# Altium PCB BMS.PcbDoc (part 1 of 2)
Units mil, origin at the board's own origin, x right, y up, seen from the top; angles counter-clockwise.
Board outline 4985 x 2480 mil, 2 copper layers (Top Layer, Bottom Layer); 157 components, 120 nets, 511 pads, 165 vias.
Unrouted connection lines stored in the file: 1.
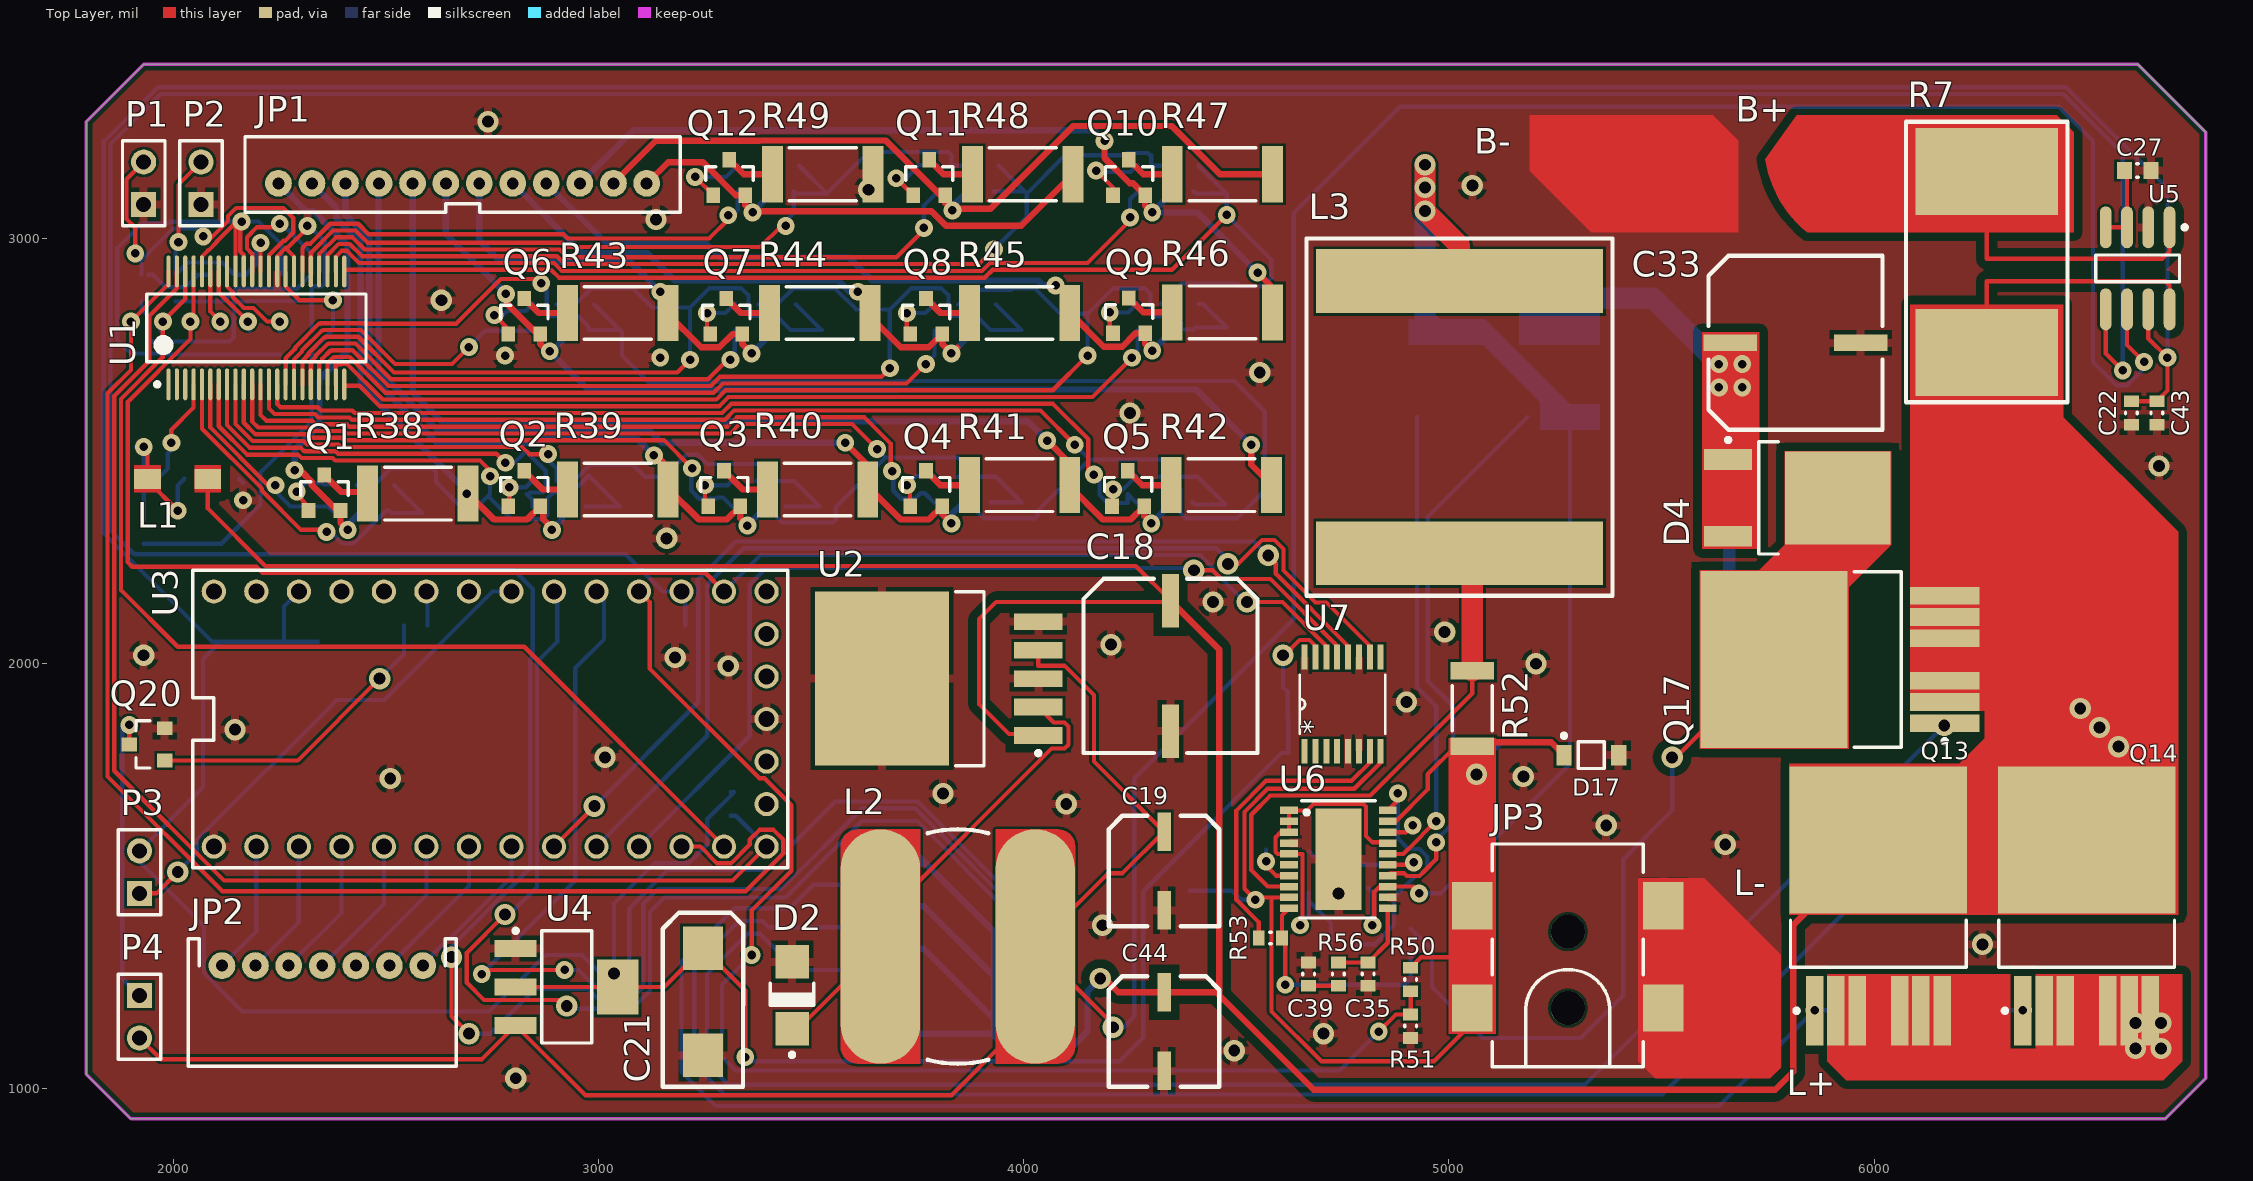
[diagram p0: Top Layer view]
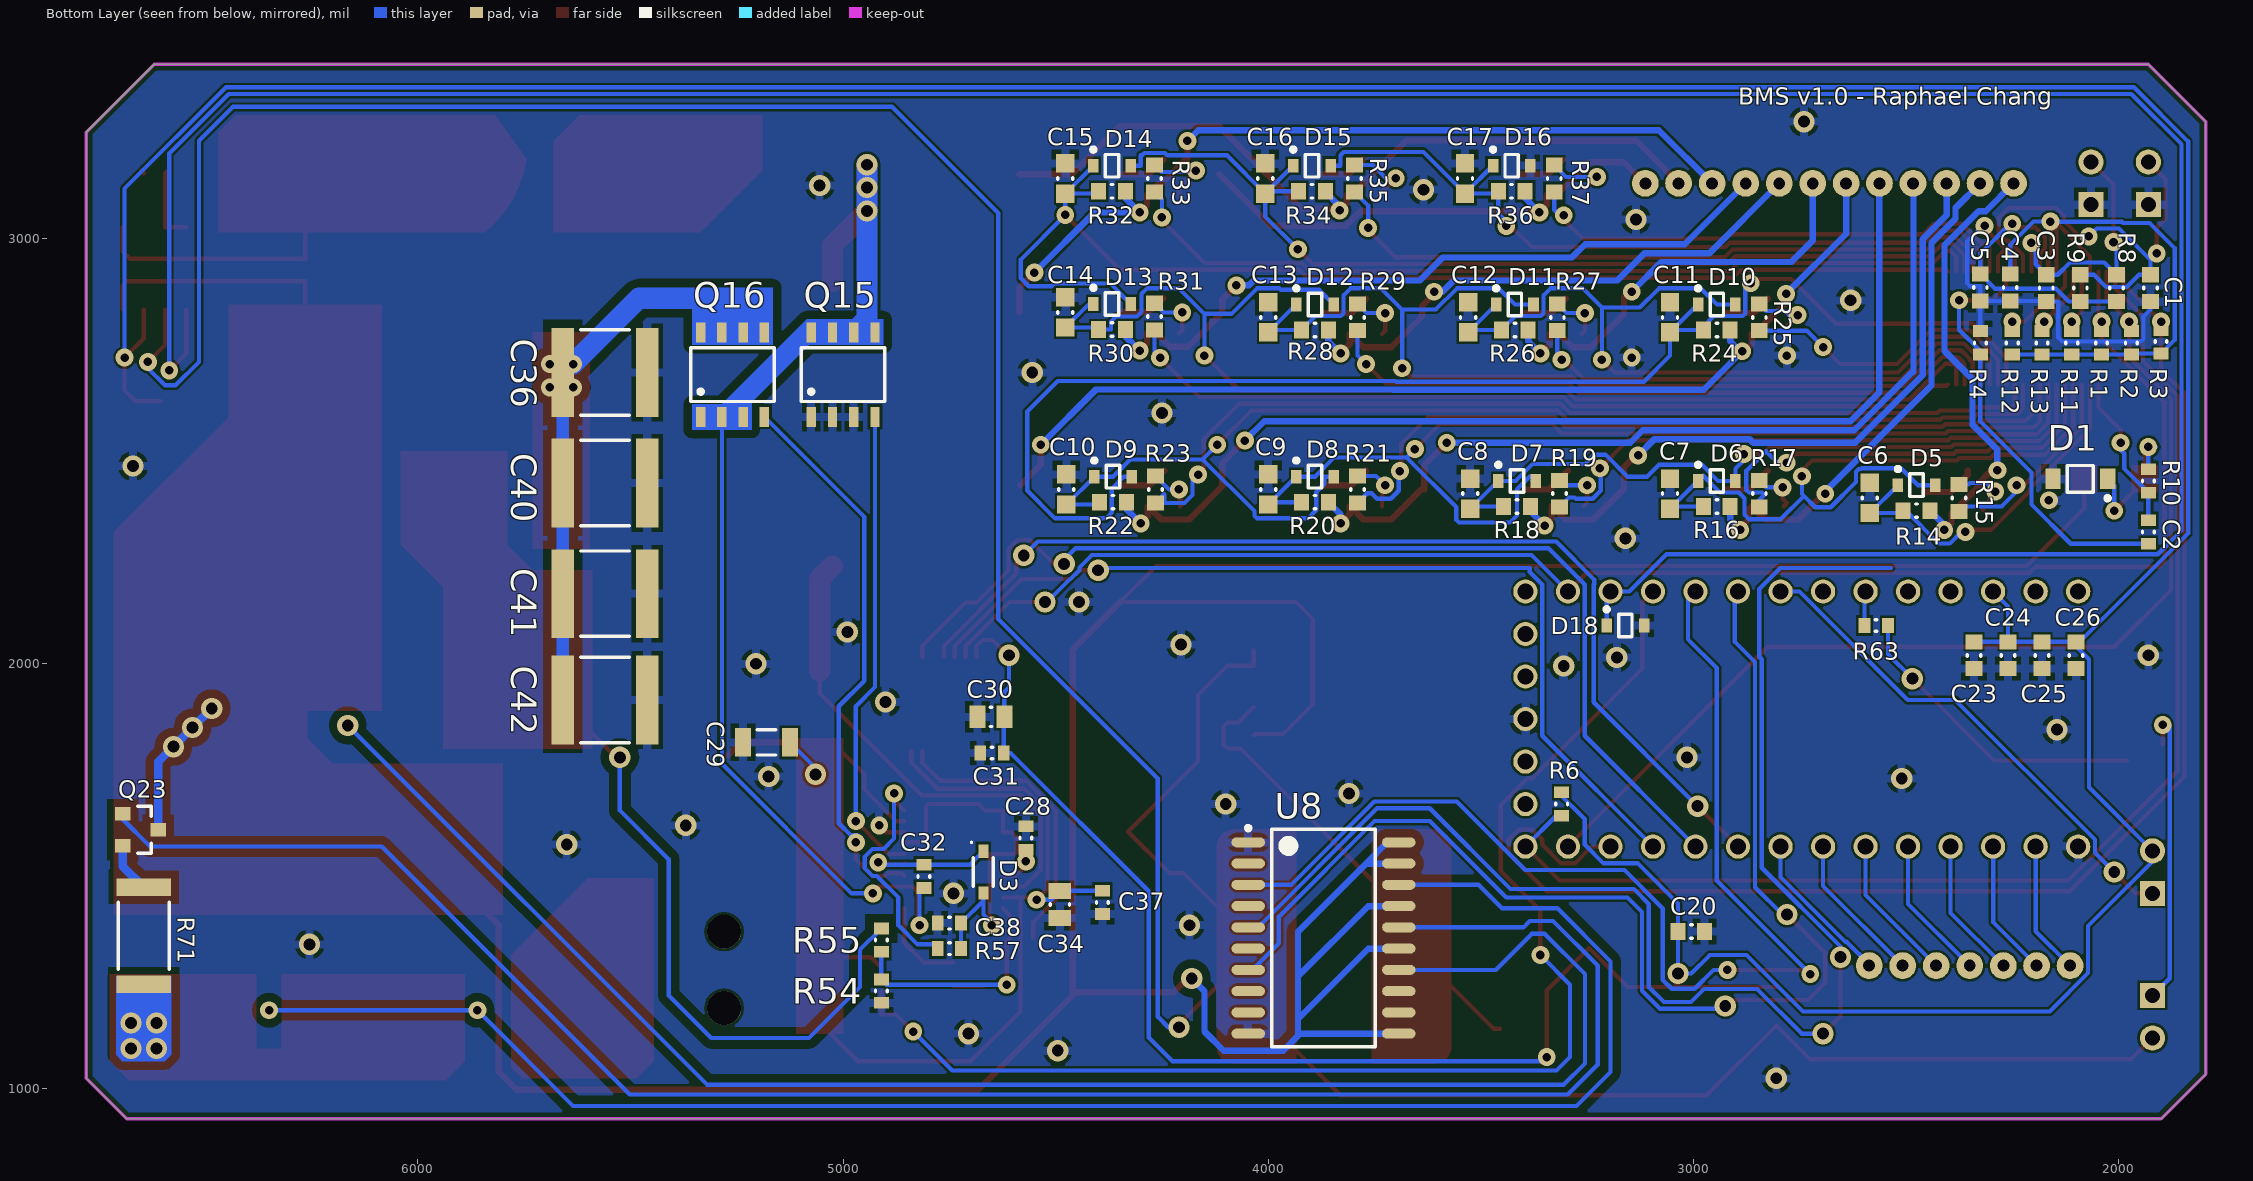
[diagram p1: Bottom Layer view, seen from below]

## Layer stack, top to bottom
Top Solder: solder mask 0.4, Solder Resist, Dk 3.5
Top Layer: signal copper 1.4
Dielectric 1: dielectric 12.6, FR-4, Dk 4.8
Bottom Layer: signal copper 1.4
Bottom Solder: solder mask 0.4, Solder Resist, Dk 3.5

## Board outline
1795,1035 1900,930 6685,930 6780,1025 6780,3250 6620,3410 1930,3410 1795,3275

## Design rules (kind name [scope] priority, off if disabled: settings)
Clearance Clearance_10 [InNet('LOAD_GATE') vs InNet('GND')] p1: gap=19.68
Clearance Clearance_9 [InNet('PRECHARGE') vs InNet('GND')] p2: gap=19.68
Clearance Clearance_8 [InNet('NetQ17_2') vs InNet('GND')] p3: gap=19.68
Clearance Clearance_7 [InNet('NetQ23_3') vs InNet('GND')] p4: gap=19.68
Clearance Clearance_6 [InNet('NetD4_1') vs InNet('GND')] p5: gap=19.68
Clearance Clearance_5 [InNet('NetC33_1') vs InNet('GND')] p6: gap=19.68
Clearance Clearance_4 [(IsRegion AND InNet('NetC32_1')) vs InNet('GND')] p7: gap=19.68
Clearance Clearance_3 [InNet('L+') vs InNet('GND')] p8: gap=19.68
Clearance Clearance_2 [InNet('B+') vs InNet('GND')] p9: gap=19.68
Clearance Clearance_1 [InNet('VDD') vs InNet('GND')] p10: gap=19.68
Clearance [All] p11: gap=5.91
PolygonConnect [All] p1: connectstyle=Relief reliefconductorwidth=20 reliefentries=4 polygonreliefangle="90 Angle" airgapwidth=10
RoutingVias [All] p1: holewidth=28 width=50 viastyle="Through Hole" minholewidth=20 minwidth=40 maxholewidth=28 maxwidth=50
SolderMaskExpansion [All] p1: expansion=4
Width [All] p1: maxlimit=50 minlimit=10 preferedwidth=10
30 further rules are at their usual default settings.

## Classes and differential pairs
component class U_Charging: C28 C29 C30 C31 C32 C33 C34 C35 C36 C37 C38 C39 C40 C41 C42 D3 D4 D17 JP3 L3 Q15 Q16 Q17 R50 R51 R52 R53 R54 R55 R56 R57 U6 U7
component class U_LTC6803: C1 C2 C3 C4 C5 C6 C7 C8 C9 C10 C11 C12 C13 C14 C15 C16 C17 D1 D5 D6 D7 D8 D9 D10 D11 D12 D13 D14 D15 D16 JP1 L1 P1 P2 Q1 Q2 Q3 Q4 Q5 Q6 Q7 Q8 Q9 Q10 Q11 Q12 R1 R2 R3 R4 R8 R9 R10 R11 R12 R13 R14 R15 R16 R17 R18 R19 R20 R21 R22 R23 R24 R25 R26 R27 R28 R29 R30 R31 R32 R33 R34 R35 R36 R37 R38 R39 R40 R41 R42 R43 R44 R45 R46 R47 R48 R49 U1
component class U_MCU: C18 C19 C20 C21 C22 C23 C24 C25 C26 C27 C43 C44 D2 D18 JP2 L2 P3 P4 Q13 Q14 Q20 Q23 R6 R7 R63 R71 U2 U3 U4 U5 U8

## Components (designator, comment, footprint, x,y, rotation, side; value= is the part's Value field where it differs from the comment)
C1 "1uF" CAPC0603(1608)100_N 1925,2883.5 r90 bottom
C2 "100nF" CAPC0603(1608)100_L 1930,2310 r90 bottom
C3 "1uF" CAPC0603(1608)100_N 2170,2883.5 r90 bottom
C4 "1uF" CAPC0603(1608)100_N 2255,2885 r90 bottom
C5 "1uF" CAPC0603(1608)100_N 2325,2885 r90 bottom
C6 "100nF" CAPC0603(1608)100_M 2585,2390 r270 bottom
C7 "100nF" CAPC0603(1608)100_M 3055,2400 r270 bottom
C8 "100nF" CAPC0603(1608)100_M 3525,2400 r270 bottom
C9 "100nF" CAPC0603(1608)100_M 4000,2410 r270 bottom
C10 "100nF" CAPC0603(1608)100_M 4475,2410 r270 bottom
C11 "100nF" CAPC0603(1608)100_M 3055,2815 r270 bottom
C12 "100nF" CAPC0603(1608)100_M 3530,2815 r270 bottom
C13 "100nF" CAPC0603(1608)100_M 4000,2815 r270 bottom
C14 "100nF" CAPC0603(1608)100_M 4477.28,2826.42 r270 bottom
C15 "100nF" CAPC0603(1608)100_M 4477.28,3141.42 r270 bottom
C16 "100nF" CAPC0603(1608)100_M 4007.28,3141.42 r270 bottom
C17 "100nF" CAPC0603(1608)100_M 3537.28,3141.42 r270 bottom
C18 "" "CAP 180UF 50V" 4345,1995 r0 top
C19 "" "CAP 300uF 6.3V" 4330,1512.52 r0 top
C20 "2.2uF" CAPC0603(1608)55_N 3005,1370 r180 bottom
C21 "100uF" AVX-CAPC7343_V 3245,1205 r270 top
C22 "2.2uF" CAPC0603(1608)55_L 6605,2590 r90 top
C23 "2.2uF" CAPC0603(1608)55_N 2340,2020 r90 bottom
C24 "2.2uF" CAPC0603(1608)55_N 2260,2020 r90 bottom
C25 "2.2uF" CAPC0603(1608)55_N 2180,2020 r90 bottom
C26 "2.2uF" CAPC0603(1608)55_N 2100,2020 r90 bottom
C27 "2.2uF" CAPC0603(1608)55_N 6620,3160 r180 top
C28 "0.1uF" CAPC0603(1608)100_L 4570,1590 r90 bottom
C29 "47uF" CAPC1206(3216)190_L 5180,1815 r0 bottom
C30 "10uF" CAPC0805(2012)145_L 4652.2,1875 r180 bottom
C31 "100nF" CAPC0603(1608)100_L 4649.65,1790 r180 bottom
C32 "0.1uF" CAPC0603(1608)100_L 4810,1500 r90 bottom
C33 "" "CAP 180UF 50V" 5815,2755 r90 top
C34 "10uF" CAPC0805(2012)145_L 4490,1433.78 r90 bottom
C35 "180pF" CAPC0603(1608)100_L 4810,1270 r270 top
C36 "22uF" CAPC2220(5750)230_L 5560,2685 r0 bottom
C37 "100nF" CAPC0603(1608)100_L 4390,1438.78 r90 bottom
C38 "4.7uF" CAPC0603(1608)55_L 4750,1390 r180 bottom
C39 "15nF" CAPC0603(1608)100_L 4670,1270 r90 top
C40 "22uF" CAPC2220(5750)230_L 5560,2425 r0 bottom
C41 "22uF" CAPC2220(5750)230_L 5560,2165 r0 bottom
C42 "22uF" CAPC2220(5750)230_L 5560,1915 r0 bottom
C43 "2.2uF" CAPC0603(1608)55_L 6665,2590 r90 top
C44 "" "CAP 300uF 6.3V" 4330,1135 r0 top
D1 "" SOD-123 2090,2435 r0 bottom
D2 "MURA130T3G" ONSC-SMA-2-403D-02_V 3455,1220 r90 top
D3 "BAS170W" INF-SOD323_V 4670,1510 r180 bottom
D4 "V12W60C" DPAK229P1003X238-3N 5820,2390 r0 top
D5 "" ONSC-SOD-323-2-477-02_V 2475,2420 r180 bottom
D6 "" ONSC-SOD-323-2-477-02_V 2945,2430 r180 bottom
D7 "" ONSC-SOD-323-2-477-02_V 3415,2430 r180 bottom
D8 "" ONSC-SOD-323-2-477-02_V 3890,2440 r180 bottom
D9 "" ONSC-SOD-323-2-477-02_V 4365,2440 r180 bottom
D10 "" ONSC-SOD-323-2-477-02_V 2945,2845 r180 bottom
D11 "" ONSC-SOD-323-2-477-02_V 3420,2845 r180 bottom
D12 "" ONSC-SOD-323-2-477-02_V 3890,2845 r180 bottom
D13 "" ONSC-SOD-323-2-477-02_V 4367.28,2846.42 r180 bottom
D14 "" ONSC-SOD-323-2-477-02_V 4367.28,3171.42 r180 bottom
D15 "" ONSC-SOD-323-2-477-02_V 3897.28,3171.42 r180 bottom
D16 "" ONSC-SOD-323-2-477-02_V 3427.28,3171.42 r180 bottom
D17 "" ONSC-SOD-123-2-425-04_V 5335,1785 r0 top
D18 "" ONSC-SOD-323-2-477-02_V 3160,2090 r180 bottom
JP1 "" JST-6-PTH-VERT 2680,3130 r0 top
JP2 "" JST-7-PTH 2350,1290 r180 top
JP3 "" POWER_JACK_SMD_OVERPASTE_REDBOARD_0603 5280,1190 r90 top
L1 "" MURA-BLM31-B60-CHIP-2_V3 2010,2435 r180 top
L2 "" SDR1307 3845,1335 r0 top
L3 "" IHLP-6767GZ 5025,2580 r90 top
P1 "Header 2" HDR1X2 1930,3080 r90 top
P2 "Header 2" HDR1X2 2065,3080 r90 top
P3 "Header 2" HDR1X2 1920,1460 r90 top
P4 "Header 2" HDR1X2 1920,1220 r270 top
Q1 "MOSFET-P" SOT23-3 2355,2400 r0 top
Q2 "MOSFET-P" SOT23-3 2825,2410 r0 top
Q3 "MOSFET-P" SOT23-3 3295,2410 r0 top
Q4 "MOSFET-P" SOT23-3 3770,2410 r0 top
Q5 "MOSFET-P" SOT23-3 4245,2410 r0 top
Q6 "MOSFET-P" SOT23-3 2825,2815 r0 top
Q7 "MOSFET-P" SOT23-3 3300,2815 r0 top
Q8 "MOSFET-P" SOT23-3 3770,2815 r0 top
Q9 "MOSFET-P" SOT23-3 4247.28,2816.42 r0 top
Q10 "MOSFET-P" SOT23-3 4247.28,3141.42 r0 top
Q11 "MOSFET-P" SOT23-3 3777.28,3141.42 r0 top
Q12 "MOSFET-P" SOT23-3 3307.28,3141.42 r0 top
Q13 "IRFS7530" DPAK127P1525X483-7N 6010,1430 r90 top
Q14 "IRFS7530" DPAK127P1525X483-7N 6500,1430 r90 top
Q15 "MOSFET-N" SOIC127P600X175-8N 5000,2680 r90 bottom
Q16 "" SOIC127P600X175-8N 5260,2680 r90 bottom
Q17 "IRFS7530" DPAK127P1525X483-7N 5920,2010 r180 top
Q20 "MOSFET-N" SOT23-3 1940,1810 r90 top
Q23 "MOSFET-N" SOT23-3 6655,1610 r270 bottom
R1 "1M" RESC0603(1608)_L 2040,2755 r90 bottom
R2 "1M" RESC0603(1608)_L 1970,2755 r90 bottom
R3 "1M" RESC0603(1608)_L 1900,2757.44 r90 bottom
R4 "100R" RESC0603(1608)_L 2325,2755 r270 bottom
R6 "1K" RESC0603(1608)_L 3310,1670 r270 bottom
R7 "" WSLP5931 6265,2945 r90 top
R8 "100K" RESC0603(1608)_N 2005,2883.5 r270 bottom
R9 "100K" RESC0603(1608)_N 2090,2883.5 r270 bottom
R10 "100R" RESC0603(1608)_L 1930,2430 r90 bottom
R11 "1M" RESC0603(1608)_L 2110,2755 r90 bottom
R12 "1M" RESC0603(1608)_L 2250,2755 r90 bottom
R13 "1M" RESC0603(1608)_L 2180,2755 r90 bottom
R14 "100R" RESC0603(1608)_N 2475,2360 r180 bottom
R15 "3K3" RESC0603(1608)_N 2375,2390 r90 bottom
R16 "100R" RESC0603(1608)_N 2945,2370 r180 bottom
R17 "3K3" RESC0603(1608)_N 2845,2400 r90 bottom
R18 "100R" RESC0603(1608)_N 3415,2370 r180 bottom
R19 "3K3" RESC0603(1608)_N 3315,2400 r90 bottom
R20 "100R" RESC0603(1608)_N 3890,2380 r180 bottom
R21 "3K3" RESC0603(1608)_N 3790,2410 r90 bottom
R22 "100R" RESC0603(1608)_N 4365,2380 r180 bottom
R23 "3K3" RESC0603(1608)_N 4265,2410 r90 bottom
R24 "100R" RESC0603(1608)_N 2945,2785 r180 bottom
R25 "3K3" RESC0603(1608)_N 2845,2815 r90 bottom
R26 "100R" RESC0603(1608)_N 3420,2785 r180 bottom
R27 "3K3" RESC0603(1608)_N 3320,2815 r90 bottom
R28 "100R" RESC0603(1608)_N 3890,2785 r180 bottom
R29 "3K3" RESC0603(1608)_N 3790,2815 r90 bottom
R30 "100R" RESC0603(1608)_N 4367.28,2786.42 r180 bottom
R31 "3K3" RESC0603(1608)_N 4267.28,2816.42 r90 bottom
R32 "100R" RESC0603(1608)_N 4367.28,3111.42 r180 bottom
R33 "3K3" RESC0603(1608)_N 4267.28,3141.42 r90 bottom
R34 "100R" RESC0603(1608)_N 3897.28,3111.42 r180 bottom
R35 "3K3" RESC0603(1608)_N 3797.28,3141.42 r90 bottom
R36 "100R" RESC0603(1608)_N 3427.28,3111.42 r180 bottom
R37 "3K3" RESC0603(1608)_N 3327.28,3141.42 r90 bottom
R38 "3R3" RESC2512(6432)_N 2575,2400 r180 top
R39 "3R3" RESC2512(6432)_N 3045,2410 r180 top
R40 "3R3" RESC2512(6432)_N 3515,2410 r180 top
R41 "3R3" RESC2512(6432)_N 3990,2420 r180 top
R42 "3R3" RESC2512(6432)_N 4465,2420 r180 top
R43 "3R3" RESC2512(6432)_N 3045,2825 r180 top
R44 "3R3" RESC2512(6432)_N 3520,2825 r180 top
R45 "3R3" RESC2512(6432)_N 3990,2825 r180 top
R46 "3R3" RESC2512(6432)_N 4467.28,2826.42 r180 top
R47 "3R3" RESC2512(6432)_N 4467.28,3151.42 r180 top
R48 "3R3" RESC2512(6432)_N 3997.28,3151.42 r180 top
R49 "3R3" RESC2512(6432)_N 3527.28,3151.42 r180 top
R50 "18K" RESC0603(1608)_L 4910,1257.56 r90 top
R51 "3K6" RESC0603(1608)_L 4910,1147.56 r90 top
R52 "0.008R" RESC2010(5025)_L 5055,1895 r270 top
R53 "232K" RESC0603(1608)_L 4580,1355 r0 top
R54 "12K4" RESC0603(1608)_L 4910,1230 r90 bottom
R55 "464K" RESC0603(1608)_L 4910,1350 r90 bottom
R56 "15K" RESC0603(1608)_L 4740,1270 r270 top
R57 "100K" RESC0603(1608)_L 4750,1330 r0 bottom
R63 "100R" RESC0603(1608)_L 2570,2090 r180 bottom
R71 "750R" RESC2512(6432)_L 6645,1360 r90 bottom
U1 "LTC6803HG-3#PBF" LT-G-44_L 2195,2790 r90 top
U2 "LM2575HV" TS5B_L 3800,1965 r180 top
U3 "" TEENSY_3.0_BASIC 2745,1870 r90 top
U4 "TC2117" SOT-223-DB3_M 2925,1240 r0 top
U5 "LMP8602" M08A_M 6620,2930 r270 top
U6 "LTC3769" TSOP65P640X120_HS-21N 4740,1540 r0 top
U7 "AD5761R" RU_16 4750,1905 r90 top
U8 "LT1161" LT-SW-20_L 3870,1355 r180 bottom

## Footprints (in the part's own frame and the unit in brackets; to place one, negate y for a bottom-side part, rotate by r counter-clockwise, add the part's x,y. Pads: shape width x height; smd on the part's side, far side on the other; paste and mask are expansions set on the pad)
AVX-CAPC7343_V [mm] "SMT Capacitor, 2 Leads, Body 7.3x4.3mm"
  rect 2.6x2.4 smd: 1(-3.202,0.007) 2(3.198,0.007)
  silkscreen extent -5.33,-2.39 5.08,2.41, body extent -3.49,-2.03 3.51,2.04, height 4.05
"CAP 180UF 50V" [mm]
  rect 1x3.2 smd: 1(0,3.9) 2(0,-3.9)
  silkscreen extent -5.2,-5.2 5.2,5.2
"CAP 300uF 6.3V" [mm]
  rect 0.8x2.3 smd: 1(0,2.35) 2(0,-2.35)
  silkscreen extent -3.3,-3.3 3.3,3.3
CAPC0603(1608)55_L [mm] "Chip Capacitor, Body 1.6x0.8mm, Height 0.55mm, IPC High Density"
  rect 0.7x0.9 smd: 1(-0.7,0) 2(0.7,0)
  silkscreen extent -0.05,-0.35 0.05,0.35, body extent -0.87,-0.47 0.88,0.48, height 0.55
CAPC0603(1608)55_N [mm] "Chip Capacitor, Body 1.6x0.8mm, Height 0.55mm, IPC Medium Density"
  rect 0.9x1 smd: 1(-0.8,0) 2(0.8,0)
  silkscreen extent -0.05,-0.4 0.05,0.4, body extent -0.87,-0.48 0.88,0.47, height 0.55
CAPC0603(1608)100_L [mm] "Chip Capacitor, Body 1.6x0.8mm, Height 1.0mm, IPC High Density"
  rect 0.7x0.9 smd: 1(-0.7,0) 2(0.7,0)
  silkscreen extent -0.05,-0.35 0.05,0.35, body extent -0.87,-0.47 0.88,0.48, height 1
CAPC0603(1608)100_M [mm] "Chip Capacitor, Body 1.6x0.8mm, Height 1.0mm, IPC Low Density"
  rect 1.1x1.1 smd: 1(-0.9,0) 2(0.9,0)
  silkscreen extent -0.05,-0.45 0.05,0.45, body extent -0.87,-0.47 0.88,0.48, height 1
CAPC0603(1608)100_N [mm] "Chip Capacitor, Body 1.6x0.8mm, Height 1.0mm, IPC Medium Density"
  rect 0.9x1 smd: 1(-0.8,0) 2(0.8,0)
  silkscreen extent -0.05,-0.4 0.05,0.4, body extent -0.87,-0.48 0.88,0.47, height 1
CAPC0805(2012)145_L [mm] "Chip Capacitor, Body 2.0x1.2mm, Height 1.45mm, IPC High Density"
  rect 0.95x1.35 smd: 1(-0.8,0) 2(0.8,0)
  silkscreen extent -0.05,-0.58 0.05,0.58, body extent -1.1,-0.72 1.1,0.72, height 1.45
CAPC1206(3216)190_L [mm] "Chip Capacitor, Body 3.2x1.6mm, Height 1.9mm, IPC High Density"
  rect 0.95x1.7 smd: 1(-1.4,0) 2(1.4,0)
  silkscreen extent -0.55,-0.75 0.55,0.75, body extent -1.7,-0.9 1.7,0.9, height 1.9
CAPC2220(5750)230_L [mm] "Chip Capacitor, Body 5.7x5.0mm, Height 2.3mm, IPC High Density"
  rect 1.35x5.3 smd: 1(-2.525,0) 2(2.525,0)
  silkscreen extent -1.45,-2.55 1.45,2.55, body extent -3.05,-2.7 3.05,2.7, height 2.3
DPAK127P1525X483-7N [mm] "D2-PAK, 7-Pads, Body 7.93x8.63mm (max), IPC Medium Density"
  rect 4.15x1.05 smd mask+0.051: 1(-6.25,3.81) 2(-6.25,-3.81) 2(-6.25,-2.54) 2(-6.25,-1.27) 2(-6.25,1.27) 2(-6.25,2.54)
  rect 8.8x10.6 smd: 8(3.95,0)
  silkscreen extent -6.37,-5.25 -0.85,5.25, body extent -3.65,-5.28 6,5.28, height 4.83
DPAK229P1003X238-3N [mm] "D-PAK, 3-Pads, Body 6.21x6.73mm (max), IPC Medium Density"
  rect 2.85x1.25 smd: 1(-4.15,-2.29) 1(-4.15,2.29)
  rect 6.3x5.55 smd: 2(2.4,0)
  silkscreen extent -4.27,-3.35 -1.15,3.59, body extent -2.5,-3.37 3.72,3.37, height 2.38
HDR1X2 [mm] "Connector; Header; 2 Position"
  rect 1.5x1.5 hole 0.9: 1(0,0)
  round 1.5 hole 0.9: 2(2.54,0)
  silkscreen extent -1.27,-1.27 3.81,1.27
IHLP-6767GZ [mil]
  rect 150x675 smd: 1(-320,0) 2(320,0)
  silkscreen extent -420,-360 420,360
INF-SOD323_V [mm] "SOD, 2-Leads, Body 1.7x1.25 mm"
  rect 0.6x0.8 smd: 1(0,1.25) 2(0,-1.25)
  silkscreen extent -0.76,-0.85 0.6,1.83, body extent -0.63,-0.85 0.63,0.85, height 1.1
JST-6-PTH-VERT [mil]
  round 63 hole 28: 1(-433.07,0) 2(-354.33,0) 3(-275.59,0) 4(-196.59,0) 5(-117.59,0) 6(-39.37,0) 7(39.37,0) 8(118.11,0) 9(196.85,0) 10(275.85,0) 11(354.85,0) 12(433.07,0)
  silkscreen extent -512,-68 512,110
JST-7-PTH [mil]
  round 63 hole 28: 1(-236.48,0) 2(-157.74,0) 3(-79,0) 4(0,0) 5(79,0) 6(157.22,0) 7(235.96,0)
  silkscreen extent -315,-63 315,237
LT-G-44_L [mm] "SOP, 44-Leads, Body 13.1x5.6mm, Pitch 0.5mm, IPC High Density"
  oval 1.9x0.25 smd: 1(-3.375,5.25) 2(-3.375,4.75) 3(-3.375,4.25) 4(-3.375,3.75) 5(-3.375,3.25) 6(-3.375,2.75) 7(-3.375,2.25) 8(-3.375,1.75) 9(-3.375,1.25) 10(-3.375,0.75) 11(-3.375,0.25) 12(-3.375,-0.25) 13(-3.375,-0.75) 14(-3.375,-1.25) 15(-3.375,-1.75) 16(-3.375,-2.25) 17(-3.375,-2.75) 18(-3.375,-3.25) 19(-3.375,-3.75) 20(-3.375,-4.25) 21(-3.375,-4.75) 22(-3.375,-5.25) 23(3.375,-5.25) 24(3.375,-4.75) 25(3.375,-4.25) 26(3.375,-3.75) 27(3.375,-3.25) 28(3.375,-2.75) 29(3.375,-2.25) 30(3.375,-1.75) 31(3.375,-1.25) 32(3.375,-0.75) 33(3.375,-0.25) 34(3.375,0.25) 35(3.375,0.75) 36(3.375,1.25) 37(3.375,1.75) 38(3.375,2.25) 39(3.375,2.75) 40(3.375,3.25) 41(3.375,3.75) 42(3.375,4.25) 43(3.375,4.75) 44(3.375,5.25)
  silkscreen extent -3.5,-6.55 2.02,6.55, body extent -2.8,-6.55 2.8,6.55, height 2
LT-SW-20_L [mm] "SOIC, 20-Leads, Body 12.8x7.49mm, Pitch 1.27mm, IPC High Density"
  oval 2x0.6 smd: 1(-4.5,5.715) 2(-4.5,4.445) 3(-4.5,3.175) 4(-4.5,1.905) 5(-4.5,0.635) 6(-4.5,-0.635) 7(-4.5,-1.905) 8(-4.5,-3.175) 9(-4.5,-4.445) 10(-4.5,-5.715) 11(4.5,-5.715) 12(4.5,-4.445) 13(4.5,-3.175) 14(4.5,-1.905) 15(4.5,-0.635) 16(4.5,0.635) 17(4.5,1.905) 18(4.5,3.175) 19(4.5,4.445) 20(4.5,5.715)
  silkscreen extent -4.63,-6.5 3.1,6.69, body extent -3.8,-6.5 3.8,6.5, height 2.65
M08A_M [mm] "SOIC, 8-Leads, Body 4.9x3.9mm, Pitch 1.27mm, IPC Low Density"
  oval 2.5x0.7 smd: 1(-2.45,1.905) 2(-2.45,0.635) 3(-2.45,-0.635) 4(-2.45,-1.905) 5(2.45,-1.905) 6(2.45,-0.635) 7(2.45,0.635) 8(2.45,1.905)
  silkscreen extent -2.57,-2.5 0.8,2.93, body extent -2,-2.5 2,2.5, height 1.75
MURA-BLM31-B60-CHIP-2_V3 [mm] "Chip Ferrite Bead, 2-Leads, Body 3.2x1.6mm, Height 1.3mm, 70um Land Pad Thickness, 6A Rated Current"
  rect 1.6x1.2 smd: 1(-1.8,0) 2(1.8,0)
  Top Layer region: -2.6,-0.825 -1,-0.825 -1,0.825 -2.6,0.825
  Top Layer region: 2.6,0.825 1,0.825 1,-0.825 2.6,-0.825
  body extent -1.6,-0.8 1.6,0.8, height 1.3
ONSC-SMA-2-403D-02_V [mm] "Molded, 2-Leads, Body 4.57x2.92mm"
  rect 2x2 smd: 1(-2,0) 2(2,0)
  silkscreen extent -3.67,-1.3 0.74,1.3, body extent -2.16,-1.3 2.16,1.3, height 2.2
ONSC-SOD-123-2-425-04_V [mm] "SOD, 2-Leads, Body 2.69x1.6mm"
  rect 0.91x1.22 smd: 1(-1.635,0) 2(1.635,0)
  silkscreen extent -1.76,-0.8 0.78,1.28, body extent -1.35,-0.8 1.35,0.8, height 1.35
ONSC-SOD-323-2-477-02_V [mm] "SOD, 2-Leads, Body 1.7x1.25mm"
  rect 0.63x0.83 smd: 1(-1.115,0) 2(1.115,0)
  silkscreen extent -1.24,-0.67 0.4,1.09, body extent -0.85,-0.63 0.85,0.63, height 1.06
POWER_JACK_SMD_OVERPASTE_REDBOARD_0603 [mil]
  round 80 hole 80: 1(0,0) 1(180,0)
  rect 111x95 smd: GND(0,-224.41) P$4(241,-224.41) VIN0(0,225) VIN1(241,225)
  silkscreen extent -138,-177 386,178
RESC0603(1608)_L [mm] "Chip Resistor, Body 1.6x0.8mm, IPC High Density"
  rect 0.7x0.9 smd: 1(-0.7,0) 2(0.7,0)
  silkscreen extent -0.05,-0.35 0.05,0.35, body extent -0.85,-0.47 0.85,0.47, height 0.6
RESC0603(1608)_N [mm] "Chip Resistor, Body 1.6x0.8mm, IPC Medium Density"
  rect 0.9x1 smd: 1(-0.8,0) 2(0.8,0)
  silkscreen extent -0.05,-0.4 0.05,0.4, body extent -0.85,-0.47 0.85,0.47, height 0.6
RESC2010(5025)_L [mm] "Chip Resistor, Body 5.0x2.5mm, IPC High Density"
  rect 1.05x2.6 smd: 1(-2.25,0) 2(2.25,0)
  silkscreen extent -1.35,-1.2 1.35,1.2, body extent -2.6,-1.35 2.6,1.35, height 0.71
RESC2512(6432)_L [mm] "Chip Resistor, Body 6.4x3.2mm, IPC High Density"
  rect 1.05x3.25 smd: 1(-2.9,0) 2(2.9,0)
  silkscreen extent -2,-1.52 2,1.53, body extent -3.25,-1.7 3.25,1.7, height 0.75
RESC2512(6432)_N [mm] "Chip Resistor, Body 6.4x3.2mm, IPC Medium Density"
  rect 1.25x3.35 smd: 1(-3,0) 2(3,0)
  silkscreen extent -2,-1.57 2,1.58, body extent -3.25,-1.7 3.25,1.7, height 0.75
RU_16 [mil]
  rect 58x14 smd: 1(-111,89.57) 2(-111,63.98) 3(-111,38.39) 4(-111,12.8) 5(-111,-12.8) 6(-111,-38.39) 7(-111,-63.98) 8(-111,-89.57) 9(111,-89.57) 10(111,-63.98) 11(111,-38.39) 12(111,-12.8) 13(111,12.8) 14(111,38.39) 15(111,63.98) 16(111,89.57)
  silkscreen extent -70,-100 70,100
SDR1307 [mm]
  rrect100% 4.75x14 smd: 1(-4.625,0) 2(4.625,0)
  Top Layer region: -6,7 -2.25,7 -2.25,-7 -6,-7 -6.383,-6.924 -6.707,-6.707 -6.924,-6.383 -7,-6 -7,-6 -7,6 -6.924,6.383 -6.707,6.707 -6.383,6.924 -6,7
  Top Layer region: 6,7 2.25,7 2.25,-7 6,-7 6.383,-6.924 6.707,-6.707 6.924,-6.383 7,-6 7,-6 7,6 6.924,6.383 6.707,6.707 6.383,6.924 6,7
  silkscreen extent -1.81,-7 1.81,7
SOD-123 [mm] "SOD, 2-Leads, Body 2.69x1.6mm"
  rect 0.91x1.22 smd: 1(-1.635,0) 2(1.635,0)
  silkscreen extent -1.76,-0.8 0.78,1.28, body extent -1.35,-0.8 1.35,0.8, height 1.35
SOIC127P600X175-8N [mm] "SOIC, 8-Leads, Body 4.90x3.90mm, Pitch 1.27mm, IPC Medium Density"
  rect 1.194x0.56 smd: 1(-2.528,-0.635) 1(-2.528,0.635) 1(-2.528,1.905) 2(-2.528,-1.905) 3(2.527,-1.905) 3(2.527,-0.635) 3(2.527,0.635) 3(2.527,1.905)
  silkscreen extent -1.6,-2.5 1.6,2.5
SOT23-3 [mil]
  rect 32x36 smd: 1(-37.4,-39.37) 2(0,44) 3(38,-39.37)
  silkscreen extent -55,-4 56,28
SOT-223-DB3_M [mm] "SOT223, 4-Leads, Body 6.5x3.5mm, Pitch 2.3mm, Lead Span 7mm, IPC Low Density"
  rect 2.5x1 smd: 1(-3.05,2.3) 2(-3.05,0) 3(-3.05,-2.3)
  rect 2.5x3.3 smd: 2(3.05,0)
  silkscreen extent -3.17,-3.35 1.5,3.47, body extent -1.85,-3.35 1.85,3.35, height 1.8
TEENSY_3.0_BASIC [mil]
  round 57 hole 38: 0(-300,550) 1(-300,450) 2(-300,350) 3(-300,250) 3.3V(300,450) 3.3V1(-100,-650) 4(-300,150) 5(-300,50) 6(-300,-50) 7(-300,-150) 8(-300,-250) 9(-300,-350) 10(-300,-450) 11(-300,-550) 12(-300,-650) 13(300,-650) 14/A0(300,-550) 15/A1(300,-450) 16/A2(300,-350) 17/A3(300,-250) 18/A4(300,-150) 19/A5(300,-50) 20/A6(300,50) 21/A7(300,150) 22/A8(300,250) 23/A9(300,350) AGND(300,550) GND(-300,650) GND1(0,-650) PGM(100,-650) RESET(200,-650) VBAT(-200,-650) VIN(300,650)
  silkscreen extent -350,-700 350,700
TS5B_L [mm] "D2-PAK, 6-Leads, Body 8.6x10.2mm, Pitch 1.7mm, Lead Span 14.1mm, IPC High Density"
  rect 2.9x1 smd: 1(-5.95,3.4) 2(-5.95,1.7) 3(-5.95,0) 4(-5.95,-1.7) 5(-5.95,-3.4)
  rect 8x10.4 smd: 6(3.4,0)
  silkscreen extent -6.08,-5.2 -1,5.2, body extent -2.7,-5.2 6.19,5.2, height 4.65
TSOP65P640X120_HS-21N [mm] "TSOP, 20-Leads, Body 6.50x4.40mm, Pitch 0.65mm, Thermal Pad 6.07x2.74mm, IPC Medium Density"
  rect 1.05x0.45 smd: 1(-2.95,2.925) 2(-2.95,2.275) 3(-2.95,1.625) 4(-2.95,0.975) 5(-2.95,0.325) 6(-2.95,-0.325) 7(-2.95,-0.975) 8(-2.95,-1.625) 9(-2.95,-2.275) 10(-2.95,-2.925) 11(2.95,-2.925) 12(2.95,-2.275) 13(2.95,-1.625) 14(2.95,-0.975) 15(2.95,-0.325) 16(2.95,0.325) 17(2.95,0.975) 18(2.95,1.625) 19(2.95,2.275) 20(2.95,2.925)
  rect 2.74x6.07 smd: 21(0,0)
  silkscreen extent -2.3,-3.5 2.2,3.5
WSLP5931 [mil]
  rect 205x334 smd: 1(-212.5,0) 2(212.5,0)
  silkscreen extent -330,-190 330,190

## Part data
C1 C3 C4 C5: library part CMP-1035-02730-1, "CAP 1uF 6.3V ±10% 0603 (1608 Metric) Thickness 1mm SMD"
C2: library part CMP-1035-02595-1, "CAP 100nF 100V ±10% 0603 (1608 Metric) Thickness 1mm SMD"
C6 C7 C8 C9 C10 C11 C12 C13 C14 C15 C16 C17 C28 C32: library part CMP-1035-02575-1, "CAP 100nF 6.3V ±5% 0603 (1608 Metric) Thickness 1mm SMD"
C18: library part "CAP 100uF 63V", "Polarized Capacitor (Axial)"
C19: library part "CAP 330uF 6.3V", "Polarized Capacitor (Axial)"
C20 C23 C24 C25 C26 C27: library part CMP-1035-02762-1, "CAP 2.2uF 16V ±10% 0603 (1608 Metric) Thickness 0.55mm SMD"
C21: library part CMP-0279-00002-1, "Capacitor, Tantalum, 220uF 10% 10V MCCT-D (7343-31)"
C22 C43: library part CMP-1035-02751-1, "CAP 2.2uF 4V ±10% 0603 (1608 Metric) Thickness 0.55mm SMD"
C29: library part CMP-1037-04995-1, "CAP 22uF 25V ±20% 1206 (3216 Metric) Thickness 1.9mm SMD"
C30 C34: library part CMP-1036-04932-1, "CAP 10uF 25V ±10% 0805 (2012 Metric) Thickness 1.45mm SMD"
C31 C37: library part CMP-1035-02587-1, "CAP 100nF 25V ±5% 0603 (1608 Metric) Thickness 1mm SMD"
C33: library part "CAP 180uF 50V", "Polarized Capacitor (Axial)"
C35: library part CMP-1035-01398-1, "CAP 180pF 6.3V ±5% 0603 (1608 Metric) Thickness 1mm SMD"
C36 C40 C41 C42: library part CMP-1042-00782-1, "CAP 22uF 50V -20% to +80% 2220 (5750 Metric) Thickness 2.2mm SMD"
C38: library part CMP-1035-02779-1, "CAP 4.7uF 6.3V ±10% 0603 (1608 Metric) Thickness 0.55mm SMD"
C39: library part CMP-1035-02358-1, "CAP 15nF 6.3V ±5% 0603 (1608 Metric) Thickness 1mm SMD"
C44: library part "CAP 47uF 50V", "Polarized Capacitor (Axial)"
D1: library part CMHZ5265B
D2: library part CMP-0902-00297-1, "Surface Mount Ultrafast Power Rectifier, 2-Pin SMA, Pb-Free, Tape and Reel"
D3: library part CMP-1182-00005-1, "Silicon Schottky Diode, -55 to 125 degC, SOD323, Reel, Green"
D5 D6 D7 D8 D9 D10 D11 D12 D13 D14 D15 D16: library part CMP-1060-00726-1, "Zener Voltage Regulator, 300 mW, 2-Pin SOD-323, Tape and Reel"
D17: library part CMP-1060-00237-1, "Zener Voltage Regulator, 500 mW, 2-Pin SOD-123, Pb-Free, Tape and Reel"
D18: library part CMP-1060-00652-1, "Zener Voltage Regulator, 300 mW, Tight Tolerance Portfolio, 2-Pin SOD-323, Pb-Free, Tape and Reel"
JP1: library part JST_12_RIGHT
JP2: library part JST_7_RIGHT
JP3: library part POWER_JACK1
L1: library part MURA-FB-2
L2: library part SDR1307-331KL, "Inductor"
L3: library part IHLP6767, "Inductor"
P1 P2 P3 P4: "Header, 2-Pin"
Q1 Q2 Q3 Q4 Q5 Q6 Q7 Q8 Q9 Q10 Q11 Q12: "P-Channel MOSFET"
Q13 Q14 Q15 Q17 Q20 Q23: "N-Channel MOSFET"
Q16: library part MOSFET-N, "N-Channel MOSFET"
R1 R2 R3 R11 R12 R13: library part CMP-1012-00849-1, "1M 0.1W 1% 0603 (1608 Metric)  SMD"
R4 R10 R14 R16 R18 R20 R22 R24 R26 R28 R30 R32 R34 R36 R63: library part CMP-1012-00050-1, "100R 0.1W 5% 0603 (1608 Metric)  SMD"
R6: library part CMP-1012-00074-1, "1K 0.1W 5% 0603 (1608 Metric)  SMD"
R7: library part SHUNT, "Resistor"
R8 R9 R57: library part CMP-1012-00122-1, "100K 0.1W 5% 0603 (1608 Metric)  SMD"
R15 R17 R19 R21 R23 R25 R27 R29 R31 R33 R35 R37: library part CMP-1012-00086-1, "3K3 0.1W 5% 0603 (1608 Metric)  SMD"
R38 R39 R40 R41 R42 R43 R44 R45 R46 R47 R48 R49: library part CMP-1018-00014-1, "3R3 1W 5% 2512 (6432 Metric)  SMD"
R50: library part CMP-1012-00650-1, "18K 0.1W 1% 0603 (1608 Metric)  SMD"
R51: library part CMP-1012-00572-1, "3K6 0.1W 1% 0603 (1608 Metric)  SMD"
R52: library part CMP-1017-00002-1, "1R 0.75W 5% 2010 (5025 Metric)  SMD"
R53: library part CMP-1012-00775-1, "232K 0.1W 1% 0603 (1608 Metric)  SMD"
R54: library part CMP-1012-00633-1, "12K4 0.1W 1% 0603 (1608 Metric)  SMD"
R55: library part CMP-1012-00811-1, "464K 0.1W 1% 0603 (1608 Metric)  SMD"
R56: library part CMP-1012-00102-1, "15K 0.1W 5% 0603 (1608 Metric)  SMD"
R71: library part CMP-1018-00496-1, "750R 1W 1% 2512 (6432 Metric)  SMD"
U1: library part CMP-0471-00238-1, "Multicell Battery Stack Monitor, 60 V Vin MAX, 44-pin SOP (G-44), -40 to 125 degC, Pb-Free"
U2: library part CMP-0069-00099-2, "SIMPLE SWITCHER® 1A Step-Down Voltage Regulator, 5-pin TO-263, Pb-Free"
U3: library part TEENSY_3.0_BASIC
U4: library part PM-LINEREG-TC2117-IL4
U5: library part CMP-0055-00659-1, "60V Common Mode, 50 x Gain, Bidirectional Precision Current Sensing Amplifier, 8 pin SOIC NARROW"
U7: library part AD5761BRUZ, "Imported"
U8: library part CMP-0479-00631-1, "Quad Protected High-Side MOSFET Driver, 8 to 48 V Vin, 20-pin SOIC (SW-20), -40 to 85 degC, Pb-Free"

## Via types
v1: diameter 42, hole 20, Top Layer to Bottom Layer, 106 vias
v2: diameter 50, hole 28, Top Layer to Bottom Layer, 59 vias

## Nets (pads, with @x,y where several pads share a name; then routed paths per layer and width w, separated by ;. In a path a pad name is that pad's centre, name@x,y a point inside that pad or via, vN(x,y) a via of type N, cw(c..) or ccw(c..) an arc to the next point about the centre after c; other vN are vias at no path point)
+5V: C19.1 L2.2 P4.2 U2.4 U4.3 U5.6 | length 8633.3
  Top Layer w10: P4.2@1920,1120 1970,1070 2725.47,1070 U4.3@2804.92,1149.45 2969.37,985 3830,985 3962.09,1117.09 3962.09,1195 L2.2@4064.59,1297.5 ; L2.2@4027.09,1335 L2.2@4064.59,1297.5 ; U2.4@4034.25,2031.93 4034.25,1995.59 4095.86,1995.59 4165,1926.45 4165,1770.04 C19.1@4330,1605.04 4232.48,1507.52 4199.61,1507.52 4102.09,1410 L2.2@4102.09,1335 ; v2(4210,1145) 4210,1152.09 L2.2@4064.59,1297.5 ; U5.6@6595,2833.54 6595,2750 v1(6635,2710)
  Bottom Layer w10: v2(4210,1145) 4235,1145 4260,1170 4260,1730 4635,2105 4635,3060 4885,3310 6435,3310 6515,3230 6515,2710 6570,2655 6595.12,2655 6635,2694.88 v1(6635,2710)
B+: R7.2 U5.1 | length 698.6
  Top Layer w10: R7.2@6265,3157.5 6265,2952.56 6677.56,2952.56 6695,2970 U5.1@6695,3026.46
C+: C29.1 C34.2 C37.2 D17.1 JP3.VIN0 JP3.VIN1 R50.2 R52.2 U6.9 U6.19 U7.8 | length 2619.6
  Top Layer w10: U6.9@4623.86,1450.43 4623.43,1450 4582.87,1450 ; U7.8@4839.57,1794 4839.57,1768.17 4777.3,1705.91 4573.41,1705.91 4519.09,1651.59 4519.09,1470.91 v1(4545,1445) 4550,1450 4582.87,1450 ; U6.19@4856.14,1629.57 4875.5,1629.57 4950,1704.07 4950,1740 5016.42,1806.42 R52.2@5055,1806.42 ; R50.2@4910,1285.12 4934.88,1310 5055,1310 JP3.VIN0@5055,1190 5055,1155 4965,1065 4700,1065 4582.87,1182.13 4582.87,1450
  Top Layer w15: R52.2@5063.58,1815 5240.63,1815 D17.1@5270.63,1785
  Bottom Layer w10: C37.2@4390,1466.34 4488.94,1466.34 C34.2@4490,1465.28 4510.28,1445 v1(4545,1445) v1@4545,1430.77 ; v2(5065,1740) 5065,1755.12 C29.1@5124.88,1815
CELL1: JP1.12 Q12.3 R36.2 R48.1 | length 1215.1
  Top Layer w15: JP1.12@3113.59,3130 3163.59,3180 3180,3180 3180.59,3179.41 3245.48,3179.41 3322.84,3102.05 Q12.3@3345.28,3102.05 3345.28,3078.42 v1(3362.28,3061.42) 3365.27,3064.41 3782.85,3064.41 3817.22,3030.04 3994.02,3030.04 R48.1@4115.39,3151.42
  Bottom Layer w15: v1(3362.28,3061.42) 3395.79,3094.92 R36.2@3395.79,3111.42
CELL2: JP1.11 Q11.3 R34.2 R47.1 | length 1859.7
  Top Layer w15: JP1.11@3034.59,3130 3134.59,3230 3378.25,3230 3379.01,3230.77 3675.55,3230.77 3804.27,3102.05 Q11.3@3815.28,3102.05 3815.28,3083.42 v1(3832.28,3066.42) 3835.96,3070.1 3921.78,3070.1 4116.68,3265 4347.88,3265 4461.47,3151.42 R47.1@4585.39,3151.42
  Bottom Layer w15: v1(3832.28,3066.42) 3832.28,3076.42 3865.79,3109.92 R34.2@3865.79,3111.42
CELL3: JP1.10 Q10.3 R32.2 R46.1 | length 1994
  Top Layer w15: v1(4190,3230) 4190,3189.74 4249.23,3130.51 4256.82,3130.51 Q10.3@4285.28,3102.05 4285.28,3078.42 v1(4302.28,3061.42) ; v1(4550,2920) 4585.39,2884.61 R46.1@4585.39,2826.42
  Bottom Layer w15: JP1.10@2956.11,3130 3081.11,3255 4165,3255 v1(4190,3230) ; R32.2@4335.79,3111.42 4335.79,3094.92 v1(4302.28,3061.42) 4408.58,3061.42 v1(4550,2920)
CELL4: JP1.9 Q9.3 R30.2 R45.1 | length 1710.6
  Top Layer w15: v1(4075,2890) 4108.11,2856.89 R45.1@4108.11,2825 4108.97,2825 4188.33,2745.64 4231.43,2745.64 4262.84,2777.05 Q9.3@4285.28,2777.05 4285.28,2753.42 v1(4302.28,2736.42)
  Bottom Layer w15: JP1.9@2877.11,3130 3020.3,2986.81 3254.53,2986.81 3285.75,2955.59 3589.46,2955.59 3643.66,2901.4 4033.79,2901.4 4045.19,2890 v1(4075,2890) ; v1(4302.28,2736.42) 4335.79,2769.92 R30.2@4335.79,2786.42
CELL5: JP1.8 Q8.3 R28.2 R44.1 | length 1346.7
  Top Layer w15: v1(3610,2875) 3606,2875 3606,2874 3638.11,2841.89 R44.1@3638.11,2825 3638.11,2817.16 3711.05,2744.22 3776.59,2744.22 Q8.3@3808,2775.63 3808,2752 v1(3830,2730) v1@3843.68,2743.68
  Bottom Layer w15: JP1.8@2798.11,3130 2962.2,2965.91 3114.9,2965.91 3179.41,2901.4 3563.79,2901.4 3590.19,2875 v1(3610,2875) ; v1(3830,2730) 3858.5,2758.5 R28.2@3858.5,2785
CELL6: JP1.7 Q7.3 R26.2 R43.1 | length 1022
  Top Layer w15: v1(3145,2875) 3145,2880 3163.11,2861.89 R43.1@3163.11,2825 3163.11,2822.16 3241.05,2744.22 3284.15,2744.22 3315.56,2775.63 Q7.3@3338,2775.63 3338,2752 v1(3360,2730)
  Bottom Layer w15: JP1.7@2719.37,3130 2719.37,2995.63 2770,2945 3075,2945 v1(3145,2875) ; v1(3360,2730) 3388.5,2758.5 R26.2@3388.5,2785
CELL7: JP1.6 Q6.3 R24.2 R42.1 | length 2436.9
  Top Layer w15: v1(2782.09,2870) 2785,2867.09 2785,2846.04 2855.41,2775.63 Q6.3@2863,2775.63 2863,2752 2880,2735 v1(2885,2735) v1@2893.68,2743.68 ; v1(4535,2515) 4535,2468.11 R42.1@4583.11,2420
  Bottom Layer w15: JP1.6@2640.63,3130 2640.63,3011.46 v1(2782.09,2870) ; R24.2@2913.5,2785 2913.5,2758.5 2890,2735 v1(2885,2735) 2975.31,2644.69 3705.84,2644.69 3706.15,2645 4405,2645 v1(4535,2515)
CELL8: JP1.5 Q5.3 R22.2 R41.1 | length 2501.7
  Top Layer w15: v1(4055,2525) 4108.11,2471.89 R41.1@4108.11,2420 4108.11,2417.16 4186.05,2339.22 4251.59,2339.22 Q5.3@4283,2370.63 4283,2347 v1(4300,2330)
  Bottom Layer w15: JP1.5@2562.41,3130 2562.41,2638.41 2630.41,2570.41 4009.59,2570.41 v1(4055,2525) ; v1(4300,2330) 4333.5,2363.5 R22.2@4333.5,2380 R22.2@4339.87,2386.37
CELL9: JP1.4 Q4.3 R20.2 R40.1 | length 2071
  Top Layer w15: v1(3580,2520) 3633.11,2466.89 R40.1@3633.11,2410 3640.27,2410 3711.05,2339.22 3776.59,2339.22 Q4.3@3808,2370.63 3808,2352 v1(3830,2330)
  Bottom Layer w15: JP1.4@2483.41,3130 2482.28,3128.87 2482.28,2687.28 2483.97,2687.28 2621.85,2549.41 3119.25,2549.41 3148.66,2520 v1(3580,2520) ; v1(3830,2330) 3830,2351.5 R20.2@3858.5,2380
CELL10: JP1.3 Q3.3 R18.2 R39.1 | length 1649.2
  Top Layer w15: v1(3130,2490) 3135,2490 3163.11,2461.89 R39.1@3163.11,2410 3165.27,2410 3236.05,2339.22 3301.59,2339.22 Q3.3@3333,2370.63 3333,2342 v1(3350,2325)
  Bottom Layer w15: JP1.3@2404.41,3130 2404.41,3055.59 2460.91,2999.09 2460.91,2679.09 2620,2520 2859.63,2520 2868.13,2528.5 3091.5,2528.5 v1(3130,2490) ; v1(3350,2325) 3383.5,2358.5 R18.2@3383.5,2370
CELL11: JP1.2 Q2.3 R16.2 R38.1 | length 1220.5
  Top Layer w15: R38.1@2693.11,2400 2753.89,2339.22 2831.59,2339.22 Q2.3@2863,2370.63 2870,2363.63 2870,2340 2890,2320 v1(2890,2315)
  Bottom Layer w15: JP1.2@2325.67,3130 2383.5,3072.17 2383.5,3046.93 2440,2990.44 2440,2655.19 2690,2405.19 v1(2690,2400) ; v1(2890,2315) 2913.5,2338.5 R16.2@2913.5,2370
CELL12: JP1.1 Q1.3 R14.2 | length 1062.3
  Top Layer w15: v1(2285,2455) 2290,2450 2303.63,2450 2325.59,2428.04 2325.59,2420.45 2393,2353.04 2393,2332 v1(2410,2315)
  Bottom Layer w15: JP1.1@2246.93,3130 2312.52,3064.41 2329.25,3064.41 2409.41,2984.25 2409.41,2735.82 2343.41,2669.82 2343.41,2562.38 2285,2503.97 v1(2285,2455) ; v1(2410,2315) 2410,2326.5 R14.2@2443.5,2360
CHARGE_SWITCH: U3.18/A4 U8.7 | length 2872.9
  Top Layer w10: v2(2780,1410) 2690,1320 2690,1250 2730.59,1209.41 2910.59,1209.41 v2(2925,1195)
  Bottom Layer w10: v2(2780,1410) 2790.73,1410 2855,1474.27 2855,2003.99 2902.44,2051.43 2902.44,2162.56 U3.18/A4@2895,2170 ; v2(2925,1195) 2931.54,1188.46 3078.46,1188.46 3120.91,1230.91 3120.91,1416.03 3154.88,1450 3440,1450 3620,1630 3750,1630 3975,1405 3975,1342.48 4037.48,1280 U8.7@4047.17,1280
DAC_OUT: R53.1 U7.7 | length 708.4
  Top Layer w10: R53.1@4552.44,1355 4552.44,1392.44 4500,1444.88 4500,1654.99 4570.01,1725 4770.81,1725 4813.98,1768.17 U7.7@4813.98,1794
GND: C1.1 C3.1 C4.1 C5.1 C6.1 C7.1 C8.1 C9.1 C10.1 C11.1 C12.1 C13.1 C14.1 C15.1 C16.1 C17.1 C18.2 C19.2 C20.2 C21.2 C22.1 C23.1 C24.1 C25.1 C26.1 C27.1 C28.2 C29.2 C30.1 C31.1 C33.2 C34.1 C35.2 C36.1 C37.1 C38.1 C39.2 C40.1 C41.1 C42.1 C43.1 C44.2 D1.2 D2.2 D16.2 D17.2 D18.2 JP3.GND JP3.P$4 P1.1 P2.1 Q15.1 Q20.3 R4.1 R49.1 R51.1 R54.1 U1.29 U1.31 U2.3 U2.5 U2.6 U3.GND U3.GND1 U4.1 U5.2 U6.4 U6.12 U6.18 U6.21 U7.5 U7.6 U7.11 U7.16 U8.1 U8.10 | length 1153.7
  Top Layer w10: U1.31@2244.21,2922.87 2244.21,2958.05 2265,2978.84 ; U1.29@2283.58,2922.87 2283.58,2958.05 2265,2976.63 2266.63,2976.63 2315,3025 v1(2315,3030) ; U6.18@4856.14,1603.98 4898.98,1603.98 v1(4915,1620) ; C27.1@6645,3153.5 C27.1@6651.5,3160
  Bottom Layer w10: C1.1@1925,2852.01 1925,2832.88 1941.38,2816.5 1941.38,2764.26 1947.77,2757.87 2132.23,2757.87 2141.91,2767.55 2141.91,2852.01 C3.1@2170,2852.01 2171.5,2853.5 C4.1@2255,2853.5 C5.1@2325,2853.5 ; D1.2@2154.37,2435 D1.2@2164.29,2425.08 ; v1(2315,3030) 2320,3030 2355.59,2994.41 2355.59,2894.26 2349.2,2887.87 2325,2887.87 C5.1@2325,2853.5 ; R4.1@2325,2782.56 C5.1@2325,2853.5
  other v1: 2163.79,2384.52 3145,2720 2780,2725
  other v2: 2805,1025 4495,1090 4705,1130 6255,1340 4185,1385 4740,1460 5650,1575 5370,1620 4100,1670 3810,1695 2510,1730 5175,1735 3015,1780 2145,1845 4900,1910 3305,1995 5205,2000 3180,2015 1930,2020 4205,2045 4990,2075 4445,2145 3160,2295 6670,2465 4250,2590 4555,2685 2630,2855 3135,3045 3635,3115 5055,3125 2740,3275
L+: Q13.2 Q14.2 R71.1
  other v2: 6615,1095 6675,1095 6615,1155 6675,1155
LOAD_GATE: Q13.1 Q14.1 U8.18 | length 4113.7
  Bottom Layer w10: U8.18@3692.83,1480 3505,1480 3450,1425 3320,1425 3195,1300 3195,1040 3275,960 5635,960 v1(5860,1185) v1(6350,1185)